# Altium PCB Heracles Nadir Panel.PcbDoc
Units mm, origin at the board's own origin, x right, y up, seen from the top; angles counter-clockwise.
Board outline 219.2 x 87 mm, 2 copper layers (Top Layer, Bottom Layer), stack 1.569 mm thick; 30 components, 44 nets, 182 pads, 170 vias.
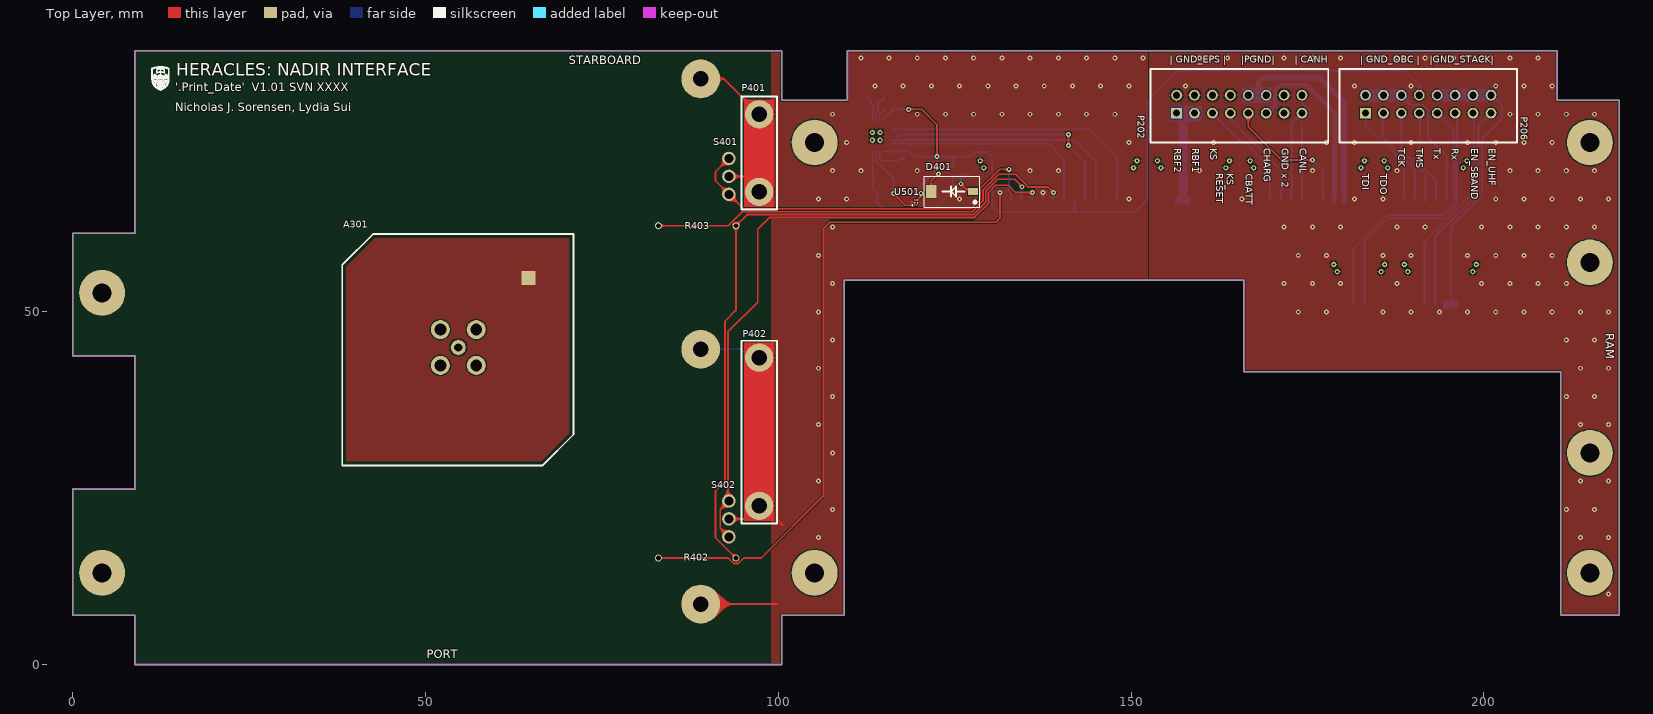
[diagram p0: Top Layer view]
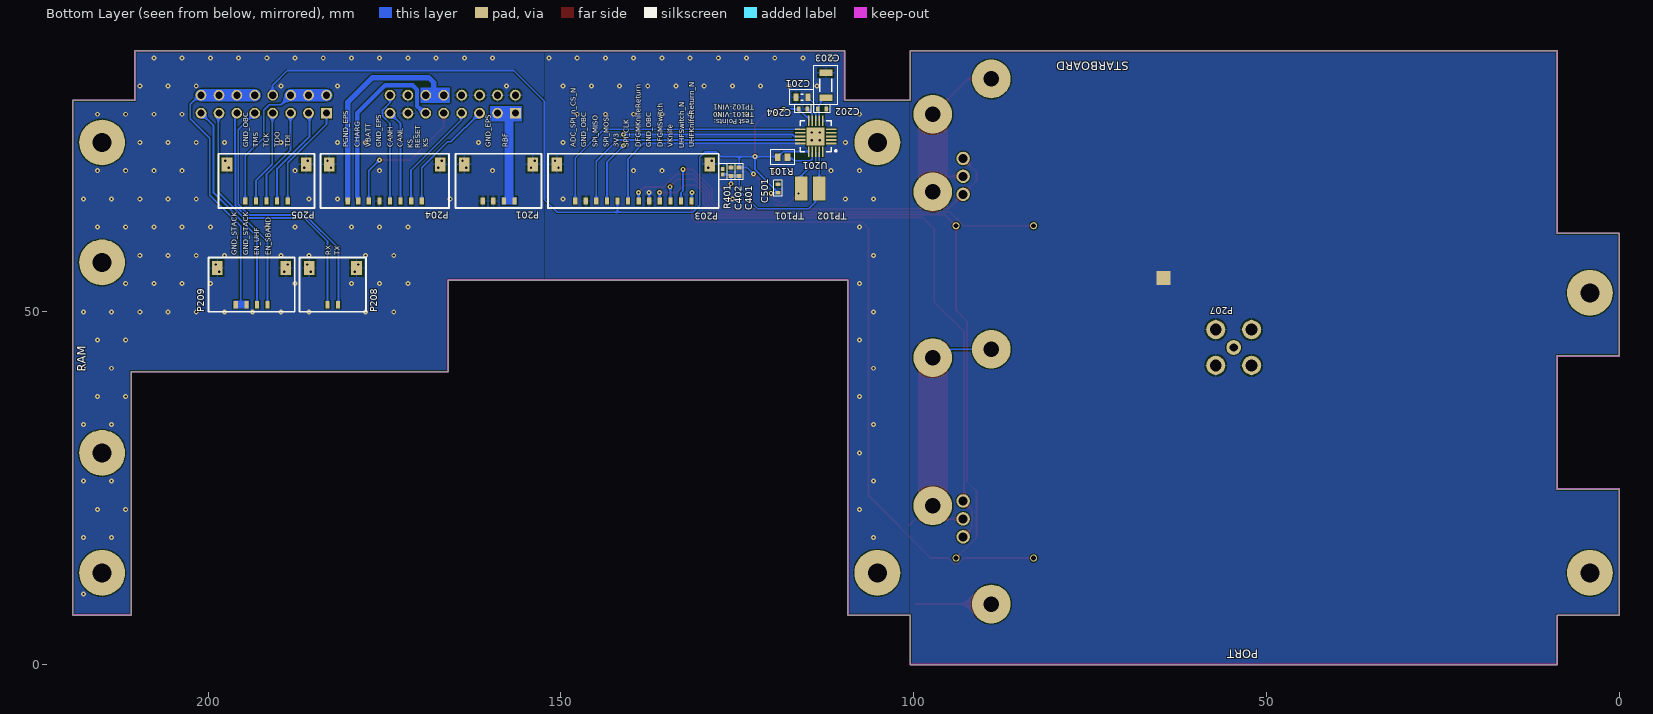
[diagram p1: Bottom Layer view, seen from below]
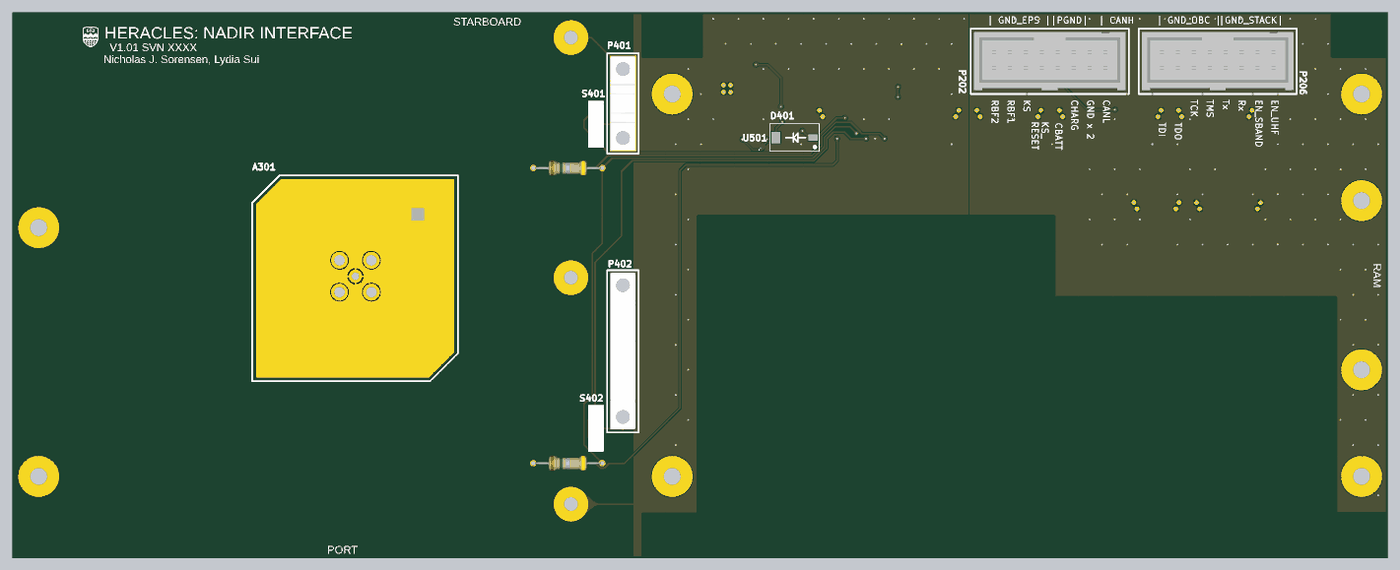
[diagram p2: 3D render of the assembled board from above, using the file's embedded part models]

## Layer stack, top to bottom
Top Solder: solder mask 0.0254, SM-001, Dk 4
Top Layer: signal copper 0.035
Dielectric 1: core 1.4986, Core-043, Dk 4.3
Bottom Layer: signal copper 0.035
Bottom Solder: solder mask 0.0254, SM-001, Dk 4

## Board outline
0,7 8.8,7 8.8,0 100.5,0 100.5,7 109.333,7 109.333,54.5 166,54.5 166,41.5 210.9,41.5 210.9,7.012 219.2,7.012 219.2,80 210.4,80 210.4,87 109.8,87 109.8,80 100.5,80 100.5,87 8.8,87 8.8,61.125 8.8,61.152 0,61.125 0,43.75 8.8,43.75 8.8,24.875 0,24.875

## Design rules (kind name [scope] priority, off if disabled: settings)
BoardOutlineClearance [All] p1: gap=0.254 ignorepadtopadclearanceinfootprint=FALSE except(0: Arc-SplitContinuation Track-SplitContinuation SMDPad-SplitContinuation THPad-SplitContinuation Via-SplitContinuation Fill-SplitContinuation Poly-SplitContinuation Region-SplitContinuation Text-SplitContinuation)
Clearance [All] p1: gap=0.152 ignorepadtopadclearanceinfootprint=FALSE
HoleSize [All] p1: absolutevalues=TRUE maxlimit=6 minlimit=0.15 maxpercent=80.000 minpercent=20.000
MinimumSolderMaskSliver [All] p1: minsoldermaskwidth=0.102
PolygonConnect [All] p1: connectstyle=Relief reliefconductorwidth=0.254 reliefentries=4 polygonreliefangle="90 Angle" airgapwidth=0.254
RoutingVias [All] p1: holewidth=0.3 width=0.7 viastyle="Through Hole" minholewidth=0.3 minwidth=0.7 maxholewidth=6 maxwidth=10
SilkToSilkClearance [All] p1: silktosilkclearance=0.051
SilkToSolderMaskClearance [IsPad] p1: minsilkscreentomaskgap=0.025 clearancetoexposedcopper=TRUE
SolderMaskExpansion [All] p1: expansion=0.013 istentingtop=FALSE
Width [All] p1: maxlimit=5.08 minlimit=0.152 preferedwidth=0.254
26 further rules are at their usual default settings.

## Classes and differential pairs
net class VIN[0..7]: VIN0 VIN1 VIN2 VIN3 VIN4 VIN5 VIN6 VIN7
component class "U_AD7298 12-Bit SPI ADC": C201 C202 C203 C204 U201
component class T1: C501 U501
component class PD1: C401 C402 D401 R401
component class "Heracles Nadir Panel": R101 TP101 TP102
component class "S-Band Antenna": A301
component class "Mechanical Interfacing": P401 P402 R402 R403 S401 S402
component class "Heracles Headers": P201 P202 P203 P204 P205 P206 P207 P208 P209

## Components (designator, comment, footprint, x,y, rotation, side; value= is the part's Value field where it differs from the comment)
A301 "Patch Antenna" Patch_Antenna 54.59,44.8 r0 top
C201 "" TDK-CGA3E 115.84,80.418 r180 bottom value=1µF
C202 "" TDK-CGA2B 112.99,78.768 r180 bottom value=0.1µF
C203 "" TDK-CGA5L 112.44,82.118 r90 bottom value=10µF
C204 "" TDK-CGA2B 115.69,78.768 r180 bottom value=0.1µF
C401 "Cap" TDK-CGA2B 124.74,69.85 r90 bottom value=0.1µF
C402 "Cap" TDK-CGA2B 125.89,69.85 r270 bottom value=100pF
C501 "Cap" TDK-CGA2B 119.24,67.5 r270 bottom value=0.1µF
D401 "PDB-C160SMCT-ND" PDB-C160SM 127.59,67.05 r180 top
P201 "WM10137CT-ND" MOLX-5040500491 158.845,65.7 r0 bottom
P202 "SAM13016-ND" TSS-108-01-G-D 156.46,78.16 r0 top
P203 "PICOLOCK 12" MOLX-5040501291 139.74,65.7 r0 bottom
P204 "WM14421CT-ND" MOLX-5040500891 174.99,65.7 r0 bottom
P205 "PICOLOCK 5" MOLX-5040500591 191.74,65.7 r0 bottom
P206 "SAM13016-ND" TSS-108-01-G-D 183.24,78.16 r0 top
P207 "J10399-ND" J10399-ND 54.65,44.94 r180 bottom
P208 "WM25693CT-ND" MOLX-5040500291 182.345,51 r0 bottom
P209 "WM10137CT-ND" MOLX-5040500491 193.845,51 r0 bottom
P401 "Antenna Saddle" ANTENNA_SADDLE 97.3,67 r90 top
P402 "DFGM Saddle" DFGM_SADDLE 97.3,22.5 r90 top
R101 "Res3" VSH-0603MCT 118.59,71.918 r0 bottom value=10k
R401 "0.1% 1/16W" PANA-ERA2A 127.04,69.85 r270 bottom value=24k
R402 "Res3" VSH-CPF1 83,15.1 r0 top value=21
R403 "Res3" VSH-CPF1 83,62.2 r0 top value=21
S401 "AV4424" PANA-AV4424 93,66.66 r90 top
S402 "AV4424" PANA-AV4424 93,18.11 r90 top
TP101 "5017" KS-5017 115.94,67.46 r270 bottom
TP102 "5017" KS-5017 113.42,67.46 r270 bottom
U201 "AD7298BCPZ-ND" ADI-CP-20-8 113.89,74.868 r0 bottom
U501 "LMT70 / 296-47337-1-ND" TI-YFQ0004 119.54,65.65 r90 top

## Footprints (in the part's own frame and the unit in brackets; to place one, negate y for a bottom-side part, rotate by r counter-clockwise, add the part's x,y. Pads: shape width x height; smd on the part's side, far side on the other; paste and mask are expansions set on the pad)
ADI-CP-20-8 [mm] "QFN, 20-Leads, Body 4.00x4.00mm, Pitch 0.50mm, Thermal Pad 2.55x2.55mm, IPC Low Density"
  rect 1.5x0.25 smd: 1(-2.2,1) 2(-2.2,0.5) 3(-2.2,0) 4(-2.2,-0.5) 5(-2.2,-1) 11(2.2,-1) 12(2.2,-0.5) 13(2.2,0) 14(2.2,0.5) 15(2.2,1)
  rect 0.25x1.5 smd: 6(-1,-2.2) 7(-0.5,-2.2) 8(0,-2.2) 9(0.5,-2.2) 10(1,-2.2) 16(1,2.2) 17(0.5,2.2) 18(0,2.2) 19(-0.5,2.2) 20(-1,2.2)
  rect 2.55x2.55 smd: 21(0,0)
  silkscreen extent -2.97,-2.2 2.2,2.2, body extent -2.07,-2.07 2.07,2.07, height 0.8
ANTENNA_SADDLE [mm] "Saddle for attaching antenna to panel"
  round 4 / inner round 4 / far side round 5.5 hole 2.2: 1(0,0) 1(11,0)
  Top Layer region: -2.125,-2.125 13.125,-2.125 13.125,2.125 -2.125,2.125
  silkscreen extent -2.5,-2.5 13.5,2.5, body extent -2,-2 13,2, height 7.29
DFGM_SADDLE [mm]
  round 4 / inner round 4 / far side round 5.5 hole 2.2: 1(0,0) 1(21,0)
  Top Layer region: -2.125,-2.125 23.125,-2.125 23.125,2.125 -2.125,2.125
  silkscreen extent -2.5,-2.5 23.4,2.5, body extent -2,-1.99 23,2.01, height 3.19
J10399-ND [mm] "CONN SMB PLUG R/A 50OHM PCB"
  round 2.1 hole 1.2: 1(0,0)
  round 2.7 hole 1.7: 2(-2.54,-2.54) 2(-2.54,2.54) 2(2.54,-2.54) 2(2.54,2.54)
  body extent -3.18,-10.2 3.17,3.19, height 8.72
KS-5017 [mil] "Testpoint Lug Mini SMD 27X10X152"
  rect 135x70 smd: 1(0,0)
  body extent -53,-20 53,20, height 60
MOLX-5040500291 [mm]
  rect 0.6x1 smd: 1(-0.75,0) 2(0.75,0)
  oval 0.711x0.711 hole 0.33: M1(-3.605,-5.7) M1(-3.105,-4.7) M2(3.105,-4.7) M2(3.605,-5.7)
  rect 1.5x2 smd: M1(-3.355,-5.2) M2(3.355,-5.2)
  silkscreen extent -4.7,-6.7 4.7,1, body extent -3.78,-6.2 3.77,0.24, height 2.01
MOLX-5040500491 [mm]
  rect 0.6x1 smd: 1(-2.25,0) 2(-0.75,0) 3(0.75,0) 4(2.25,0)
  oval 0.711x0.711 hole 0.33: M1(-5.105,-5.7) M1(-4.605,-4.7) M2(4.605,-4.7) M2(5.105,-5.7)
  rect 1.5x2 smd: M1(-4.855,-5.2) M2(4.855,-5.2)
  silkscreen extent -6.1,-6.7 6.1,1, body extent -5.28,-6.05 5.27,0.39, height 2.01
MOLX-5040500591 [mm]
  rect 0.6x1 smd: 1(-3,0) 2(-1.5,0) 3(0,0) 4(1.5,0) 5(3,0)
  oval 0.711x0.711 hole 0.33: M1(-5.855,-5.7) M1(-5.355,-4.7) M2(5.355,-4.7) M2(5.855,-5.7)
  rect 1.5x2 smd: M1(-5.605,-5.2) M2(5.605,-5.2)
  silkscreen extent -6.8,-6.7 6.8,1, body extent -6.03,-6.1 6.02,0.34, height 1.97
MOLX-5040500891 [mm]
  rect 0.6x1 smd: 1(-5.25,0) 2(-3.75,0) 3(-2.25,0) 4(-0.75,0) 5(0.75,0) 6(2.25,0) 7(3.75,0) 8(5.25,0)
  oval 0.711x0.711 hole 0.33: M1(-8.105,-5.7) M1(-7.605,-4.7) M2(7.605,-4.7) M2(8.105,-5.7)
  rect 1.5x2 smd: M1(-7.855,-5.2) M2(7.855,-5.2)
  silkscreen extent -9.1,-6.7 9.1,1, body extent -8.27,-6.05 8.27,0.39, height 2.01
MOLX-5040501291 [mm]
  rect 0.6x1 smd: 1(-8.25,0) 2(-6.75,0) 3(-5.25,0) 4(-3.75,0) 5(-2.25,0) 6(-0.75,0) 7(0.75,0) 8(2.25,0) 9(3.75,0) 10(5.25,0) 11(6.75,0) 12(8.25,0)
  oval 0.711x0.711 hole 0.33: M1(-11.105,-5.7) M1(-10.605,-4.7) M2(10.605,-4.7) M2(11.105,-5.7)
  rect 1.5x2 smd: M1(-10.855,-5.2) M2(10.855,-5.2)
  silkscreen extent -12.1,-6.7 12.1,1, body extent -11.28,-6.05 11.27,0.39, height 2.01
PANA-AV4424 [mm]
  round 1.905 hole 1.27: 1(2.54,0) 2(0,0) 3(5.08,0)
  body extent -1.21,-1.25 6.29,1.25, height 5.81
PANA-ERA2A [mm] "Chip Resistor, 2-Leads, Body 1.00x0.52mm, IPC High Density"
  rect 0.548x0.5 smd: 1(-0.376,0) 2(0.376,0)
  silkscreen extent -1.15,-0.58 1.15,0.58, body extent -0.55,-0.3 0.55,0.3, height 0.4
Patch_Antenna [mm]
  rect 2x2 smd: 1(10,10)
  rect 2x2 smd far side mask+0.102: 2(10,10)
  Top Layer pour cut-out: -3.8,3.8
  silkscreen extent -16.4,-16.6 16.39,16.21
PDB-C160SM [mm] "Photodiode"
  rect 1.45x1 smd: 1(0,0)
  rect 1.45x1.8 smd: 2(5.9,0)
  silkscreen extent -1,-2.2 6.9,2.2
TDK-CGA2B [mm] "Chip Capacitor, 2-Leads, Body 1.00x0.50mm, IPC Low Density"
  rect 0.52x0.72 smd: 1(-0.6,0) 2(0.6,0)
  silkscreen extent -1.15,-0.58 1.15,0.58, body extent -0.52,-0.28 0.53,0.27, height 0.5
TDK-CGA3E [mm] "Chip Capacitor, 2-Leads, Body 1.60x0.80mm, IPC Low Density"
  rect 0.65x1.05 smd: 1(-0.85,0) 2(0.85,0)
  silkscreen extent -1.7,-1.05 1.7,1.05, body extent -0.85,-0.45 0.85,0.45, height 0.8
TDK-CGA5L [mm] "Chip Capacitor, 2-Leads, Body 3.20x1.60mm, IPC Low Density"
  rect 0.95x1.9 smd: 1(-1.775,0) 2(1.775,0)
  silkscreen extent -2.75,-1.7 2.75,1.7, body extent -1.7,-0.9 1.7,0.9, height 1.6
TI-YFQ0004 [mm] "BGA, 4-Leads, Body 0.88x0.88mmx0.68mm, Pitch 0.40mm"
  round 0.21 smd: A1(-0.2,0.2) A2(0.2,0.2) B1(-0.2,-0.2) B2(0.2,-0.2)
  silkscreen extent -0.59,0.5 -0.5,0.59, body extent -0.44,-0.44 0.44,0.44, height 0.67
TSS-108-01-G-D [mil]
  rect 60x60 hole 40.16: 1(0,0)
  round 60 hole 40.16: 2(0,100) 3(100,0) 4(100,100) 5(200,0) 6(200,100) 7(300,0) 8(300,100) 9(400,0) 10(400,100) 11(500,0) 12(500,100) 13(600,0) 14(600,100) 15(700,0) 16(700,100)
  silkscreen extent -146,-163 846,247, body extent -125,-140 825,225, height 351
VSH-0603MCT [mm] "Chip Resistor, 2-Leads, Body 1.55x0.85mm, IPC Low Density"
  rect 0.8x1.05 smd: 1(-0.7,0) 2(0.7,0)
  silkscreen extent -1.7,-1.05 1.7,1.05, body extent -0.8,-0.48 0.8,0.48, height 0.55
VSH-CPF1 [mm] "RESISTOR METAL FILM 1W 1.00K OHM"
  round 1 hole 0.7: 1(0,0) 2(11,0)
  body extent 0.25,-1.16 10.76,2.29, height 3.81

## Part data
A301: library part PXX-ABS-00009, Manufacturer Part Number=Custom, Index=9, LatestRevisionNote=..., Part Number=PXX-ABS-00009, Publisher=AlbertaSat, Supplier 1=Digi-key
C201: library part PC-TDK-02603, "CAP CER 1UF 25V X7R 0603", Manufacturer Part Number=CGA3E1X7R1E105K080AC, Supplier Part Number 1=445-6931-1-ND, Temperature Coefficient=X7R, Tolerance=±10%, Voltage - Rated=25V, Applications=Automotive, Index=2603, LatestRevisionDate=3/16/2016, LatestRevisionNote=..., PackageReference="0603 (1608 Metric)", Part Number=PC-TDK-02603, Published=3/16/2016, Publisher=AlbertaSat, Supplier 1=Digi-key, Supplier Link=http://www.digikey.ca/product-search/en?keywords=445-6931-1-ND
C202 C204 C401 C501: library part PC-TDK-02259, "CAP CER 0.1UF 50V X7R 0402", Manufacturer Part Number=CGA2B3X7R1H104K050BB, Supplier Part Number 1=445-6899-1-ND, Temperature Coefficient=X7R, Tolerance=±10%, Voltage - Rated=50V, Applications=Automotive, Index=2259, LatestRevisionNote=..., PackageReference="0402 (1005 Metric)", Part Number=PC-TDK-02259, Publisher=AlbertaSat, Supplier 1=Digi-key, Supplier Link=http://www.digikey.ca/product-search/en?keywords=445-6899-1-ND
  C202 C204: LatestRevisionDate=3/16/2016, Published=3/16/2016
  C401 C501: LatestRevisionDate=2016-03-16, PackageDescription="Radial Cap, Thru-Hole; 2 Leads; 0.3 in Pin Spacing", Published=2016-03-16
C203: library part PC-TDK-02917, "CAP CER 10UF 25V X7R 1206", Manufacturer Part Number=CGA5L1X7R1E106K160AC, Supplier Part Number 1=445-6990-1-ND, Temperature Coefficient=X7R, Tolerance=±10%, Voltage - Rated=25V, Applications=Automotive, Index=2917, LatestRevisionDate=3/16/2016, LatestRevisionNote=..., PackageReference="1206 (3216 Metric)", Part Number=PC-TDK-02917, Published=3/16/2016, Publisher=AlbertaSat, Supplier 1=Digi-key, Supplier Link=http://www.digikey.ca/product-search/en?keywords=445-6990-1-ND
C402: library part PC-TDK-01227, "CAP CER 100PF 50V C0G 0402", Manufacturer Part Number=CGA2B2C0G1H101J050BA, Supplier Part Number 1=445-5596-1-ND, Temperature Coefficient=NP0, Tolerance=±5%, Voltage - Rated=50V, Applications=Automotive, Index=1227, LatestRevisionDate=2016-03-16, LatestRevisionNote=..., PackageDescription="Radial Cap, Thru-Hole; 2 Leads; 0.3 in Pin Spacing", PackageReference="0402 (1005 Metric)", Part Number=PC-TDK-01227, Published=2016-03-16, Publisher=AlbertaSat, Supplier 1=Digi-key, Supplier Link=http://www.digikey.ca/product-search/en?keywords=445-5596-1-ND
D401: library part PXX-ADP-00000, "SENSOR PHOTODIODE 850NM 2SMD GW", Manufacturer Part Number="Advanced Photonics", Index=1, LatestRevisionDate=3/28/2020, LatestRevisionNote=..., PackageReference=PIN2, Part Number=PXX-ADP-00000, Published=3/28/2020, Publisher=AlbertaSat, Supplier 1=Digi-key, Supplier Part Number 1=PDB-C160SMCT-ND
P201 P209: library part 63, "CONN HEADER SMD R/A 4POS 1.5MM", Manufacturer Part Number=5040500491, LatestRevisionDate=17-Jul-2002, LatestRevisionNote="Re-released for DXP Platform.", Part Number=63, Publisher="Altium Limited", Supplier 1=Digi-Key, Supplier Link=#https://www.digikey.ca/product-detail/en/molex/5040500491/WM10137CT-ND/4357653#, Supplier Part Number 1=WM10137CT-ND
P202 P206: library part PP-SAM-00007, "CONN HEADER VERT 16POS 2.54MM", Manufacturer Part Number=TSS-108-01-G-D, Index=8, LatestRevisionDate=7/1/2020, LatestRevisionNote=..., Part Number=PP-SAM-00007, Published=7/1/2020, Publisher=AlbertaSat, Supplier 1=Digi-key, Supplier Link=#https://www.digikey.ca/en/products/detail/samtec-inc/TSS-108-01-G-D/2345166#, Supplier Part Number 1=SAM13016-ND
P203: library part 71, "CONN HEADER SMD R/A 12POS 1.5MM", Manufacturer Part Number=5040501291, Supplier Part Number 1=WM16219CT-ND, LatestRevisionDate=17-Jul-2002, LatestRevisionNote="Re-released for DXP Platform.", Part Number=71, Publisher="Altium Limited", Supplier 1=Digi-Key, Supplier Link=#https://www.digikey.ca/product-detail/en/molex/5040501291/WM16219CT-ND/6702294#
P204: library part 67, "CONN HEADER SMD R/A 8POS 1.5MM", Manufacturer Part Number=5040500891, LatestRevisionDate=17-Jul-2002, LatestRevisionNote="Re-released for DXP Platform.", Part Number=67, Publisher="Altium Limited", Supplier 1=Digi-Key, Supplier Link=#https://www.digikey.ca/product-detail/en/molex/5040500891/WM14421CT-ND/6133151#, Supplier Part Number 1=WM14421CT-ND
P205: library part 64, "CONN HEADER SMD R/A 5POS 1.5MM", Manufacturer Part Number=5040500591, Supplier Part Number 1=WM24877CT-ND, LatestRevisionDate=17-Jul-2002, LatestRevisionNote="Re-released for DXP Platform.", Part Number=64, Publisher="Altium Limited", Supplier 1=Digi-Key, Supplier Link=https://www.digikey.ca/product-detail/en/molex/5040500591/WM24877CT-ND/9659635
P207: library part P01-CIN-00000, "CONN SMB PLUG R/A 50OHM PCB", Manufacturer Part Number="Cinch Connectivity Solutions Johnson", Index=1, LatestRevisionDate=7/6/2020, LatestRevisionNote=..., Part Number=P01-CIN-00000, Published=7/6/2020, Publisher=AlbertaSat, Supplier 1=Digi-key, Supplier Link=#https://www.digikey.ca/en/products/detail/cinch-connectivity-solutions-johnson/131-1801-371/251419#, Supplier Part Number 1=J10399-ND
P208: library part 61, "CONN HEADER SMD R/A 2POS 1.5MM", Manufacturer Part Number=5040500291, LatestRevisionDate=17-Jul-2002, LatestRevisionNote="Re-released for DXP Platform.", Part Number=61, Publisher="Altium Limited", Supplier 1=Digi-Key, Supplier Link=#https://www.digikey.ca/product-detail/en/molex/5040500291/WM25693CT-ND/9954119#, Supplier Part Number 1=WM25693CT-ND
P401: library part PXX-ABS-00001, Manufacturer Part Number=Custom, Index=1, LatestRevisionNote=..., Part Number=PXX-ABS-00001, Publisher=AlbertaSat, Supplier 1=Digi-key
P402: library part PXX-ABS-00010, Manufacturer Part Number=Custom, Index=10, LatestRevisionNote=..., Part Number=PXX-ABS-00010, Publisher=AlbertaSat, Supplier 1=Digi-key
R101: library part PR-VSH-00143, "RES SMD 10K OHM 1% 1/8W 0603", Manufacturer Part Number=MCT06030C1002FP500, Power - Rated=1/8W, Supplier Part Number 1=MCT0603-10.0K-CFCT-ND, Temperature Coefficient=±50ppm/°C, Tolerance=±1%, Applications="General Purpose", Index=143, LatestRevisionDate=3/14/2016, LatestRevisionNote=..., PackageDescription="Chip Resistor, 2-Leads, Body 1.55x0.85mm, IPC Low Density", PackageReference="0603 (1608 Metric)", Part Number=PR-VSH-00143, Published=3/14/2016, Publisher=AlbertaSat, Supplier 1=Digi-key, Supplier Link=http://www.digikey.ca/product-search/en?keywords=MCT0603-10.0K-CFCT-ND
R401: library part 17830, "RES SMD 24K OHM 0.1% 1/16W 0402", Manufacturer Part Number=ERA-2APB243X, Power="0.063W, 1/16W", Supplier Part Number 1=P24KCNCT-ND, Temperature Coefficient=±15ppm/°C, Tolerance=±0.1%, LatestRevisionDate=29-May-2009, LatestRevisionNote="IPC-7351 Footprint Added.", PackageDescription="Chip Resistor, 2-Leads, Body 1.00x0.50mm, IPC Low Density", PackageReference="0402 (1005 Metric)", Part Number=17830, Published=8-Jun-2000, Publisher="Altium Limited", Supplier 1=Digi-Key, Supplier Link=http://www.digikey.ca/product-search/en?keywords=P24KCNCT-ND
R402 R403: library part PR-VSH-00317, "21 Ohms ±1% 1W Through Hole Resistor Axial Flame Proof, Moisture Resistant, Safety Metal Film", Manufacturer Part Number=CPF121R000FKEE6, Power - Rated=1W, Supplier Part Number 1=CPF21.0CCT-ND, Temperature Coefficient=±100ppm/°C, Tolerance=±1%, Index=317, LatestRevisionDate=2/27/2020, LatestRevisionNote=..., PackageDescription="Chip Resistor", PackageReference=VSH-CPF1, Part Number=PR-VSH-00317, Published=2/27/2020, Publisher=AlbertaSat, Supplier 1=Digi-key, Supplier Link=#https://www.digikey.ca/product-detail/en/vishay-dale/CPF121R000FKEE6/CPF21.0CCT-ND/2713126#
S401 S402: library part 20035, "SWITCH SNAP ACT SPDT 500MA 30V", Supplier Part Number 1=255-3743-ND, Manufacturer Part Number=AV4424, Part Number=20035, Supplier 1=Digi-Key, Supplier Link=#https://www.digikey.com/product-detail/en/panasonic-electric-works/AV4424/255-3743-ND/646766#
TP101 TP102: library part PTP-KS-00001, "PC TEST POINT MINI SMD", Supplier Part Number 1=36-5017CT-ND, Index=1, LatestRevisionDate=3/15/2016, LatestRevisionNote=..., Manufacturer Part Number=5017, PackageDescription="Testpoint Lug Mini SMD 27X10X152", PackageReference=KS-5017, Part Number=PTP-KS-00001, Published=3/15/2016, Publisher=AlbertaSat, Supplier 1=Digi-key, Supplier 2=Newark, Supplier 3=Mouser, Supplier Link=http://www.digikey.ca/product-detail/en/keystone-electronics/5017/36-5017TR-ND/2217304
U201: library part PU-ADI-00007, "IC ADC 12BIT SAR 20LFCSP-WQ", Manufacturer Part Number=AD7298BCPZ, Index=7, LatestRevisionDate=7/16/2019, LatestRevisionNote=..., PackageDescription="QFN, 20-Leads, Body 4.00x4.00mm, Pitch 0.50mm, Thermal Pad 2.55x2.55mm, IPC Low Density", PackageReference="20-WFQFN Exposed Pad", Part Number=PU-ADI-00007, Published=7/16/2019, Publisher=AlbertaSat, Supplier 1=Digi-key, Supplier 2=Mouser, Supplier Link=#https://www.digikey.ca/product-detail/en/analog-devices-inc/AD7298BCPZ/AD7298BCPZ-ND/2507320#, Supplier Part Number 1=AD7298BCPZ-ND, Supplier Part Number 2=584-AD7298BCPZ
U501: library part 70, "Temperature Sensor Analog, Local -55°C ~ 150°C 5.194mV/°C 4-DSBGA (0.81x0.81)", Manufacturer Part Number=LMT70YFQR, Operating Temperature="-55°C ~ 150°C", Supplier Part Number 1=296-47337-1-ND, PackageReference="BGA, 4-Leads, Body 0.88x0.88mmx0.68mm, Pitch 0.40mm", Part Number=70, Supplier 1=Digi-Key, Supplier Link=#https://www.digikey.ca/product-detail/en/texas-instruments/LMT70YFQR/296-47337-1-ND/7688347#

## Free pads (board coordinates)
  round 5.5 hole 2.2: 3(89,8.58) 3(89,44.7) 3(89,83.02)
  round 6.5 hole 2.7: CHASSIS(4.15,13) CHASSIS(4.15,52.688) CHASSIS(105.15,13) CHASSIS(105.15,74) CHASSIS(215.05,13) CHASSIS(215.05,30) CHASSIS(215.05,57) CHASSIS(215.05,74)

## Via types
v1: diameter 0.7, hole 0.3, Top Layer to Bottom Layer, tented both sides, 166 vias
v2: diameter 0.711, hole 0.33, Top Layer to Bottom Layer, 4 vias

## Nets (pads, with @x,y where several pads share a name; then routed paths per layer and width w, separated by ;. In a path a pad name is that pad's centre, name@x,y a point inside that pad or via, vN(x,y) a via of type N, cw(c..) or ccw(c..) an arc to the next point about the centre after c; other vN are vias at no path point)
3V3: C204.1 C401.2 C501.2 D401.2 P203.8 P206.8 R101.2 U201.10 U201.16 U501.A2 U501.B2 | length 134.6
  Top Layer w0.254: v1(118.49,78.7) 120.34,78.7 122.49,76.55 v1(122.49,72) ; U501.A2 U501.B2 120.202,66.312 120.202,66.762 v1(120.24,66.8) ; D401.2 121.69,68.55 v1(122.69,69.55)
  Bottom Layer w0.254: U201.16 114.89,72.721 114.892,72.723 118.486,72.723 118.892,72.316 119.017,72.316 119.333,72 v1(122.49,72) ; U201.10 114.89,77.621 114.892,77.623 115.244,77.623 116.157,78.535 C204.1@116.29,78.668 ; C204.1 116.335,78.724 116.782,78.724 116.801,78.743 118.447,78.743 v1(118.49,78.7) ; v1(120.24,66.8) 119.34,66.8 C501.2 119.34,66.9 119.473,67.033 119.473,67.133 122.49,70.15 v1(122.49,72) ; v1(122.69,69.55) 123.59,70.45 C401.2 124.74,72 ; P203.8 141.99,64.1 ; P206.8 190.884,80.724 190.884,82.106 188.79,84.2 156.69,84.2 152.34,79.85 152.34,65.9 150.54,64.1 141.99,64.1 ; v1(122.49,72) 124.74,72 ; 124.74,72 127.3,72 127.94,72.64 129.62,72.64 130.32,71.94 130.32,65.08 131.3,64.1 141.99,64.1
ADC_SPI_nCS_N: P203.12 U201.11 | length 39.7
  Bottom Layer w0.254: U201.11 143.922,75.868 147.99,71.8 P203.12
CANH: P202.16 P204.4 | length 15.9
  Bottom Layer w0.254: P204.4 174.24,76.687 175.281,77.729 175.281,78.591 174.24,79.633 P202.16
CANL: P202.15 P204.3 | length 13.1
  Bottom Layer w0.254: P204.3 172.74,76.66 P202.15
CHARG: P202.11 P204.7 | length 26.8
  Bottom Layer w0.635: P202.11 169.401,78.16 170.41,79.169 170.41,81.47 171.04,82.1 174.94,82.1 178.859,78.181 178.859,66.275 178.74,66.156 P204.7
DFGMKnifeReturn: P203.6 R403.1 | length 62.2
  Top Layer w0.254: R403.1 92.898,62.2 94.887,64.189 127.47,64.189 129.001,65.72 129.001,67.25 130.957,69.206 131.251,69.5 133.635,69.5 135.149,67.986 135.149,67.951 135.4,67.7 138.2,67.7 v1(139,66.9)
  Bottom Layer w0.254: P203.6 138.99,66.89 v1(139,66.9)
DFGMSwitch: P203.4 S402.2 S402.3 | length 90.4
  Top Layer w0.254: S402.2 91.768,19.342 91.768,21.958 92.855,23.045 92.855,47.155 97.076,51.376 97.076,61.676 98.776,63.376 127.806,63.376 129.814,65.384 129.814,66.914 130.845,67.945 132.585,67.945 133.63,66.9 v1(136.06,66.9)
  Bottom Layer w0.254: P203.4 135.99,66.83 v1(136.06,66.9)
EN_SBAND: P206.13 P209.1 | length 30.1
  Bottom Layer w0.254: P209.1 191.595,59.955 198.59,66.95 198.59,78.05 P206.13
EN_UHF: P206.15 P209.2 | length 30.4
  Bottom Layer w0.254: P209.2 193.095,60.705 199.24,66.85 199.24,76.38 P206.15
GND: C201.1 C202.2 C203.2 C204.2 C402.1 C501.1 P203.5 P203.11 P203.M1 P203.M2 P401.1 P402.1 pad.3 R401.1 S401.1 S402.1 U201.6 U201.9 U201.21 U501.A1 | length 44.8
  Top Layer w0.203: 118.7,65.6 119.051,65.6 119.182,65.469 119.319,65.469 119.338,65.45 U501.A1
  Top Layer w0.254: pad.3@89,8.58 99.82,8.58 ; pad.3@89,83.02 92.28,83.02 P401.1@97.3,78 ; S402.1 95.45,20.65 P402.1@97.3,22.5 ; S401.1 96.9,69.2 97.4,69.7 ; 99.82,20.58 100.66,19.74
  Bottom Layer w0.254: pad.3@89,44.7 94.68,44.7 95.88,43.5 P402.1@97.3,43.5 ; U201.9 114.39,77.978 114.536,78.124 114.536,78.214 114.857,78.535 114.957,78.535 115.09,78.668 C204.2 ; P203.5 137.46,65.73 137.5,65.77 v1(137.5,66.9)
  other v1: 105.7,18 107.7,22 105.7,26 107.7,30 105.7,34 107.7,38 105.7,42 107.7,46 105.7,50 107.7,54 105.7,58 107.7,62 105.7,66 109.7,66 125.7,66 149.7,66 107.7,70 111.7,70 119.7,70 135.7,70 139.7,70 109.7,74 149.7,74 107.7,78 119.7,78 123.7,78 127.7,78 131.7,78 135.7,78 139.7,78 143.7,78 147.7,78 113.7,82 117.7,82 121.7,82 125.7,82 129.7,82 133.7,82 137.7,82 141.7,82 145.7,82 149.7,82 111.7,86 115.7,86 119.7,86 123.7,86 127.7,86 131.7,86 135.7,86 139.7,86 143.7,86 147.7,86 151.7,86
  other v2: 113.34,74.318 114.44,74.318 113.34,75.418 114.44,75.418
GND_EPS: P201.3 P201.4 P201.M1 P201.M2 P202.2 P202.4 P202.6 P202.8 P202.13 P202.14 P204.5 P204.M1 P204.M2 P205.M1 P205.M2 P208.M1 P208.M2 P209.M1 P209.M2
  other v1: 217.7,10 213.7,18 217.7,18 211.7,22 215.7,22 213.7,26 217.7,26 213.7,34 217.7,34 211.7,38 215.7,38 213.7,42 217.7,42 211.7,46 215.7,46 173.7,50 177.7,50 185.7,50 189.7,50 193.7,50 197.7,50 201.7,50 205.7,50 209.7,50 213.7,50 217.7,50 171.7,54 175.7,54 179.7,54 187.7,54 199.7,54 203.7,54 207.7,54 211.7,54 173.7,58 177.7,58 185.7,58 189.7,58 197.7,58 201.7,58 205.7,58 209.7,58 171.7,62 175.7,62 179.7,62 187.7,62 191.7,62 199.7,62 203.7,62 207.7,62 211.7,62 215.7,62 165.7,66 181.7,66 185.7,66 201.7,66 205.7,66 209.7,66 213.7,66 217.7,66 159.7,70 175.7,70 187.7,70 203.7,70 207.7,70 211.7,70 215.7,70 161.7,74 177.7,74 181.7,74 189.7,74 197.7,74 201.7,74 205.7,74 209.7,74 203.7,78 207.7,78 211.7,78 215.7,78 157.7,82 181.7,82 189.7,82 201.7,82 205.7,82 209.7,82 159.7,86 163.7,86 167.7,86 171.7,86 175.7,86 179.7,86 183.7,86 187.7,86 191.7,86 195.7,86 199.7,86 203.7,86 207.7,86
GND_OBC2: P205.5 P206.2 P206.4 P206.6 | length 23.7
  Bottom Layer w0.254: P206.6 189.67,79.35 191.34,79.35 192.14,78.55 192.14,74.7 194.74,72.1 P205.5
  Bottom Layer w1.778: P206.2 P206.4 P206.6
GND_Stack: P206.10 P206.12 P206.14 P206.16 P209.3 P209.4 | length 41
  Bottom Layer w0.254: 195.24,51.1 195.39,51.25 195.39,62.15 199.79,66.55 199.79,74.6 202.54,77.35 202.54,79.4 201.24,80.7 P206.16
  Bottom Layer w1.778: P206.10 P206.12 P206.14 P206.16
KS: P202.5 P204.1 | length 16.1
  Bottom Layer w0.254: P202.5 165.607,74.093 166.087,74.093 169.74,70.44 P204.1
KS_RESET: P202.7 P204.2 | length 15.4
  Bottom Layer w0.254: P202.7 164.174,78.066 164.174,77.166 171.24,70.1 P204.2
NetA301_1: A301.1 P207.1
NetC201_2: C201.2 U201.8 | length 3.9
  Bottom Layer w0.254: U201.8 113.89,78.053 114.129,78.293 114.129,79.558 114.592,80.02 114.792,80.02 114.99,80.218 C201.2
NetC202_1: C202.1 C203.1 U201.7 | length 4
  Bottom Layer w0.254: C203.1 112.799,80.343 113.147,79.995 113.147,79.636 113.477,79.306 113.477,78.881 C202.1 113.474,78.652 113.474,78.234 113.39,78.15 U201.7
NetR101_1: R101.1 U201.17 | length 4.8
  Bottom Layer w0.254: U201.17 114.39,71.65 114.64,71.4 116.94,71.4 117.258,71.718 117.689,71.718 R101.1
NetU201_12: U201.12
PGND_EPS: P202.10 P202.12 P204.8 | length 29.6
  Bottom Layer w0.762: 167.84,80.9 168.037,81.097 168.037,82.497 168.74,83.2 176.74,83.2 180.24,79.7 P204.8
RBF: P201.1 P201.2 P202.1 P202.3 | length 12.3
  Bottom Layer w1.27: 157.34,66 157.34,77.6 157.84,78.1
RF_GND: A301.2 P207.2
Rx: P206.11 P208.2 | length 37.3
  Bottom Layer w0.254: P208.2 183.095,59.98 186.415,63.3 194.365,63.3 196.146,65.081 196.146,72.306 196.19,72.35 196.19,77.376 196.183,77.383 196.183,77.917 P206.11
SPI_CLK: P203.7 U201.15 | length 31.3
  Bottom Layer w0.254: U201.15 138.322,73.868 140.49,71.7 P203.7
SPI_MISO: P203.10 U201.14 | length 36.5
  Bottom Layer w0.254: U201.14@116.807,74.35 116.79,74.366 116.092,74.366 U201.14 141.972,74.368 144.99,71.35 P203.10
SPI_MOSI: P203.9 U201.13 | length 35
  Top Layer w0.254: v1(141.14,73.55) v1(141.14,75.15)
  Bottom Layer w0.254: U201.13@116.713,74.87 116.937,74.87 117.216,75.15 v1(141.14,75.15) ; v1(141.14,73.55) 143.49,71.2 P203.9
TCK: P205.3 P206.5 | length 13.9
  Bottom Layer w0.254: P206.5 188.34,78.14 188.34,72.9 191.74,69.5 P205.3
TDI: P205.1 P206.1 | length 14.7
  Bottom Layer w0.254: P206.1 183.24,76.6 188.74,71.1 P205.1
TDO: P205.2 P206.3 | length 14.4
  Bottom Layer w0.254: P206.3 185.64,78.02 185.64,74.9 190.24,70.3 P205.2
TMS: P205.4 P206.7 | length 13.4
  Bottom Layer w0.254: P206.7 190.94,78.08 190.94,70.9 193.24,68.6 P205.4
Tx: P206.9 P208.1 | length 38.7
  Bottom Layer w0.254: P208.1 181.54,51.055 181.54,59 186.246,63.706 194.197,63.706 195.74,65.249 195.74,75.82 P206.9
UHFKnifeReturn_N: P203.1 R402.1 | length 96
  Top Layer w0.254: R402.1 92.898,15.1 93.677,14.321 94.323,14.321 95.102,15.1 97.6,15.1 106.4,23.9 106.4,61.8 107.3,62.7 130.8,62.7 131.44,63.34 v1(131.44,66.9)
  Bottom Layer w0.254: v1(131.44,66.9) 131.49,66.85 P203.1
UHFSwitch_N: P203.2 S401.2 S401.3 | length 55
  Top Layer w0.254: S401.3 91.1,69.84 91.1,68.56 92.036,67.624 S401.2 94.299,65.361 94.299,65.356 95.059,64.596 127.301,64.596 128.594,65.889 128.594,67.419 131.376,70.2 v1(132.7,70.2)
  Bottom Layer w0.254: v1(132.7,70.2) 132.7,67.18 132.99,66.89 P203.2
VBATT: P202.9 P204.6 | length 19.4
  Top Layer w0.254: P202.9 166.62,76.22 171.34,71.5 v1(175.74,71.5)
  Bottom Layer w0.254: v1(175.74,71.5) 177.24,70 P204.6
VIN0: TP101.1 U201.18 U501.B1 | length 11.2
  Top Layer w0.203: v1(116.36,66.76) 118.029,65.091 119.489,65.091 119.739,65.341 119.739,65.449 U501.B1
  Bottom Layer w0.254: U201.18 113.89,71.35 116.36,68.88 v1(116.36,66.76)
VIN1: C401.1 C402.2 D401.1 R401.2 TP102.1 U201.19 | length 27.3
  Top Layer w0.254: v1(125.89,68.15) 126.662,67.378 127.262,67.378 D401.1
  Bottom Layer w0.254: U201.19 113.39,67.49 113.967,66.913 113.967,65.513 114.88,64.6 122.14,64.6 124.74,67.2 C401.1 C402.2 ; v1(125.89,68.15) C402.2 ; R401.2 126.214,69.474 125.99,69.25 C402.2
VIN2: U201.20
VIN3: U201.1
VIN4: U201.2
VIN5: U201.3
VIN6: U201.4
VIN7: U201.5
VKnife: P203.3 R402.2 R403.2 | length 96.2
  Top Layer w0.254: R402.2 91.1,18 91.1,24.6 92.449,25.949 92.449,48.649 94,50.2 R403.2 95.583,63.783 127.638,63.783 129.407,65.552 129.407,67.082 131.125,68.8 133.5,68.8 134.52,67.78 v1(134.52,67.725)
  Bottom Layer w0.254: P203.3 134.49,67.695 v1(134.52,67.725)

## Polygon pours and split planes (outlines as drawn)
no net on Top Solder "NONET_L04_P-001" (solid, pour order 0): 70.39,32.8 66.39,28.8 38.79,28.8 38.79,56.4 42.79,60.4 70.39,60.4
no net on Top Solder "NONET_L04_P-001" (solid): 13.5,69.4
no net on Top Solder "NONET_L04_P-001" (solid): 12,66.8
GND on Top Layer "NONET_L04_P-001" (solid, pour order 4): 99,87 99,0 152.4,0 152.4,87
GND_EPS on Top Layer "NONET_L04_P-001" (solid, pour order 7): 152.4,87.08 219.52,87.08 219.52,0 152.4,0
no net on Top Layer "NONET_L04_P-001" (solid, pour order 5): 220,87
NetA301_1 on Top Layer "Patch" (solid, pour order 1): 70.39,32.8 66.39,28.8 38.79,28.8 38.79,56.4 42.79,60.4 70.39,60.4
RF_GND on Bottom Layer "NONET_L04_P-001" (solid, pour order 3): 0,87 100.5,87 100.5,0 0,0
GND_EPS on Bottom Layer "NONET_L04_P-001" (solid, pour order 10): 152.4,87.08 219.52,87.08 219.52,0 152.4,0
GND on Bottom Layer "NONET_L04_P-001" (solid, pour order 6): 99,87 99,0 152.3,0 152.3,87
no net on Bottom Layer "NONET_L04_P-001" (solid, pour order 2): -2.1,89.8

## Keep-outs
Keep-Out Layer:
  lines w0.254: 8.8,61.125 8.8,80 8.8,87 100.5,87 100.5,80 109.8,80 109.8,87 210.4,87 210.4,80 219.2,80 219.2,7.012 210.9,7.012 210.9,41.5 166,41.5 166,54.5 109.333,54.5 109.333,7.018 ; 8.8,61.152 0,61.125 0,43.75 8.8,43.75 8.8,24.875 0,24.875 0,7 8.8,7 8.8,0 100.5,0 100.5,7 109.333,7

## Other copper
Bottom Layer:
  region net RBF: 158.44,66.3 156.24,66.3 156.24,65.2 158.44,65.2
  region net PGND_EPS: 169.94,81.8 165.74,81.8 165.74,79.6 169.94,79.6
  region net GND_Stack: 196.44,51.6 194.24,51.6 194.24,50.5 196.44,50.5
  region net RBF: 160.04,79.2 155.54,79.2 155.54,77 160.04,77

## Silkscreen, mask and mechanical layers (free items; w line width, h text height)
Top Overlay:
  drawing of 1859 lines, arcs and shapes, not listed
  text "| GND_EPS |" at 155.476,85.317 h1
  text "| GND_OBC |" at 182.476,85.317 h1
  text "|GND_STACK|" at 192.376,85.317 h1
  text "|PGND|" at 165.591,85.3 h1
  text "| CANH" at 173.237,85.3 h1
  text "STARBOARD" at 70.3,84.65 h2
  text "HERACLES: NADIR INTERFACE" at 14.665,82.853 h3
  text "'.Print_Date'  V1.01 SVN XXXX" at 14.492,80.841 h2
  text "Nicholas J. Sorensen, Lydia Sui" at 14.534,78 h2
  text "RBF2" at 156.116,73.193 h1 r270
  text "RBF1" at 158.656,73.193 h1 r270
  text "KS" at 161.196,73.193 h1 r270
  text "CHARG" at 168.816,73.193 h1 r270
  text "GND x 2" at 171.356,73.193 h1 r270
  text "CANL" at 173.896,73.193 h1 r270
  text "TCK" at 187.866,73.193 h1 r270
  text "TMS" at 190.406,73.193 h1 r270
  text "Tx" at 192.946,73.193 h1 r270
  text "Rx" at 195.486,73.193 h1 r270
  text "EN_SBAND" at 198.193,73.193 h1 r270
  text "EN_UHF" at 200.733,73.193 h1 r270
  text "KS_ / RESET" at 162.062,69.674 h1 r270
  text "CBATT" at 166.276,69.55 h1 r270
  text "TDI" at 182.786,69.55 h1 r270
  text "TDO" at 185.326,69.55 h1 r270
  text "RAM" at 216.85,46.95 h2 r270
  text "PORT" at 50.2,0.5 h2
Bottom Overlay:
  text "STARBOARD" at 69.5,85.9 h2 r180
  text "Test Points: / TP101-VIN0 / TP102-VIN1" at 122.62,79.36 h0.7 r180
  text "UHFKnifeReturn_N" at 131.097,73.3 h0.7 r270
  text "VKnife" at 134.19,73.3 h0.7 r270
  text "DFGMSwitch" at 135.59,73.3 h0.7 r270
  text "GND_OBC" at 137.207,73.3 h0.7 r270
  text "DFGMKnifeReturn" at 138.69,73.3 h0.7 r270
  text "SPI_CLK" at 140.407,73.3 h0.7 r270
  text "3V3" at 141.79,73.3 h0.7 r270
  text "SPI_MOSI" at 143.207,73.3 h0.7 r270
  text "SPI_MISO" at 144.807,73.3 h0.7 r270
  text "GND_OBC" at 146.407,73.3 h0.7 r270
  text "ADC_SPI_n_CS_N" at 147.907,73.3 h0.7 r270
  text "RBF" at 157.54,73.3 h0.7 r270
  text "GND_EPS" at 159.957,73.3 h0.7 r270
  text "KS" at 168.84,73.3 h0.7 r270
  text "CANL" at 172.44,73.3 h0.7 r270
  text "CANH" at 173.84,73.3 h0.7 r270
  text "GND_EPS" at 175.457,73.3 h0.7 r270
  text "VBATT" at 176.94,73.3 h0.7 r270
  text "CHARG" at 178.54,73.3 h0.7 r270
  text "PGND_EPS" at 180.157,73.3 h0.7 r270
  text "TDI" at 188.34,73.3 h0.7 r270
  text "TDO" at 189.84,73.3 h0.7 r270
  text "TCK" at 191.44,73.3 h0.7 r270
  text "TMS" at 192.94,73.3 h0.7 r270
  text "GND_OBC" at 194.357,73.3 h0.7 r270
  text "UHFSwitch_N" at 132.56,73.2 h0.7 r270
  text "KS_ / RESET" at 169.94,73.2 h0.7 r270
  text "TX" at 181.34,58.05 h0.7 r270
  text "RX" at 182.64,58.05 h0.7 r270
  text "EN_SBAND" at 191.157,58.05 h0.7 r270
  text "EN_UHF" at 192.757,58.05 h0.7 r270
  text "GND_STACK" at 194.357,58.05 h0.7 r270
  text "GND_STACK" at 195.957,58.05 h0.7 r270
  text "RAM" at 216.947,41.529 h2 r270
  text "PORT" at 51.2,2.5 h2 r180
Mechanical 1:
  lines w0.254: 8.8,61.125 8.8,80 8.8,87 100.5,87 100.5,80 109.8,80 109.8,87 210.4,87 210.4,80 219.2,80 219.2,7.012 210.9,7.012 210.9,41.5 166,41.5 166,54.5 109.333,54.5 109.333,7.018 ; 8.8,61.152 0,61.125 0,43.75 8.8,43.75 8.8,24.875 0,24.875 0,7 8.8,7 8.8,0 100.5,0 100.5,7 109.333,7